# Altium PCB 基站转接板原理图.PcbDoc
Units mm, origin at the board's own origin, x right, y up, seen from the top; angles counter-clockwise.
Board outline 35 x 61 mm, 2 copper layers (Top Layer, Bottom Layer); 1 components, 9 nets, 4 pads, 0 vias.
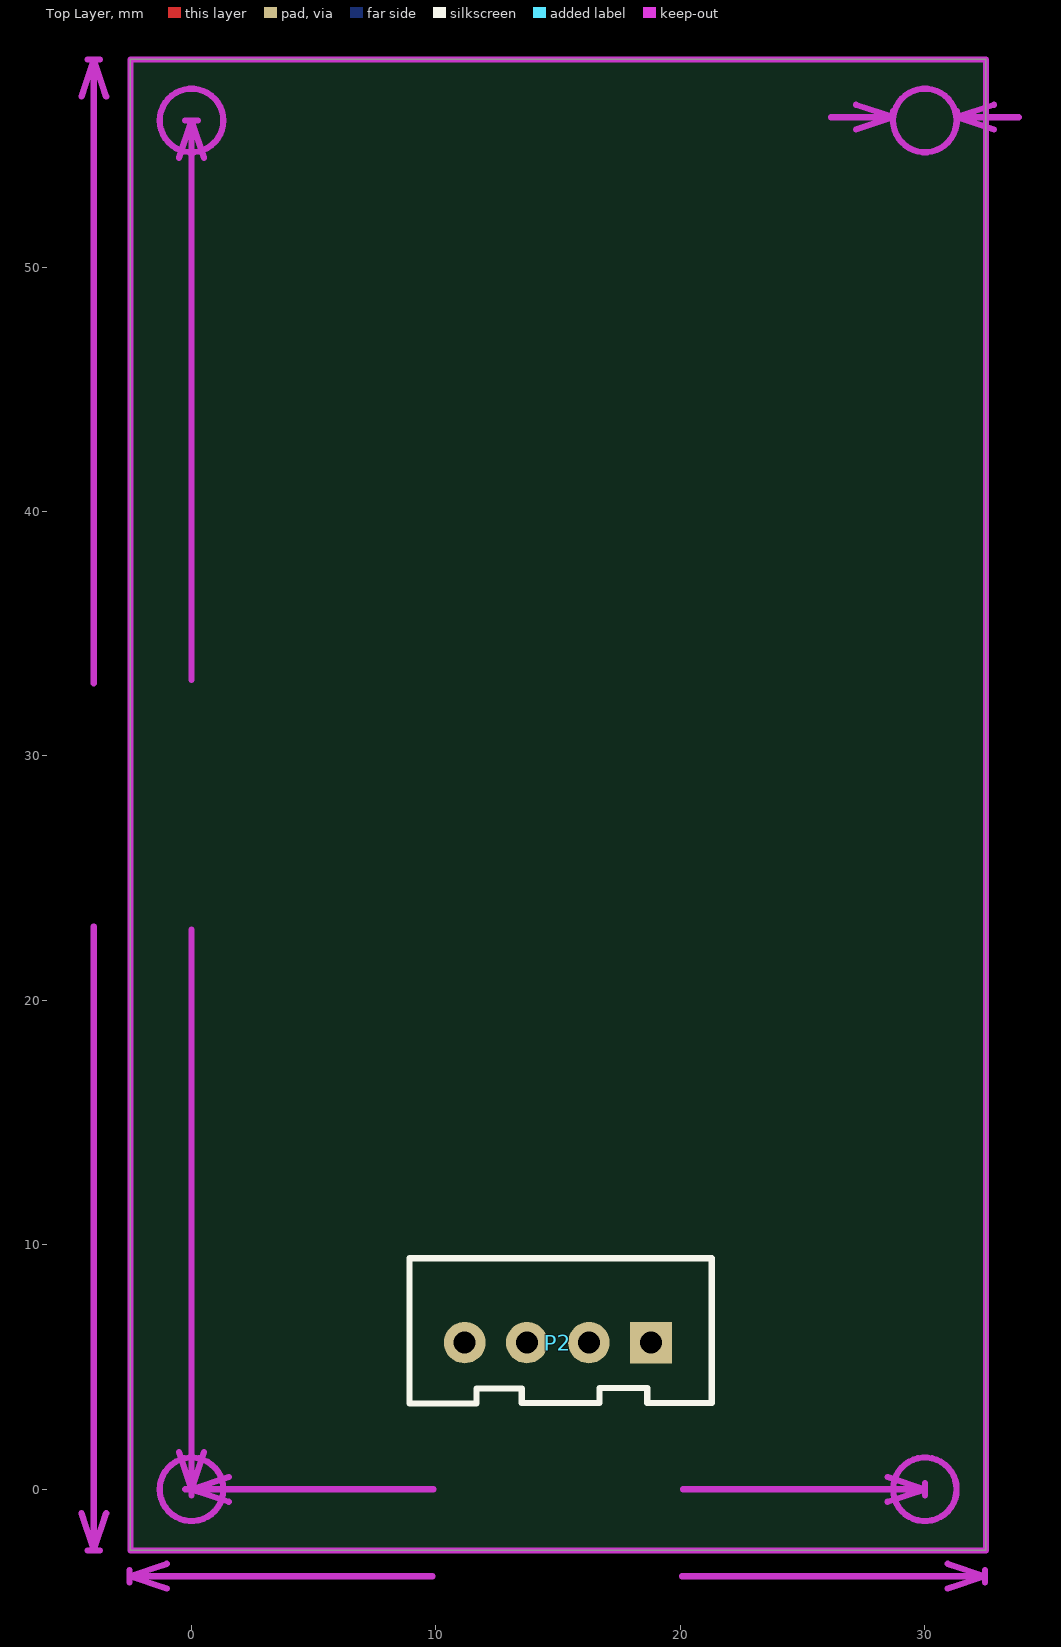
[diagram p0: Top Layer view]
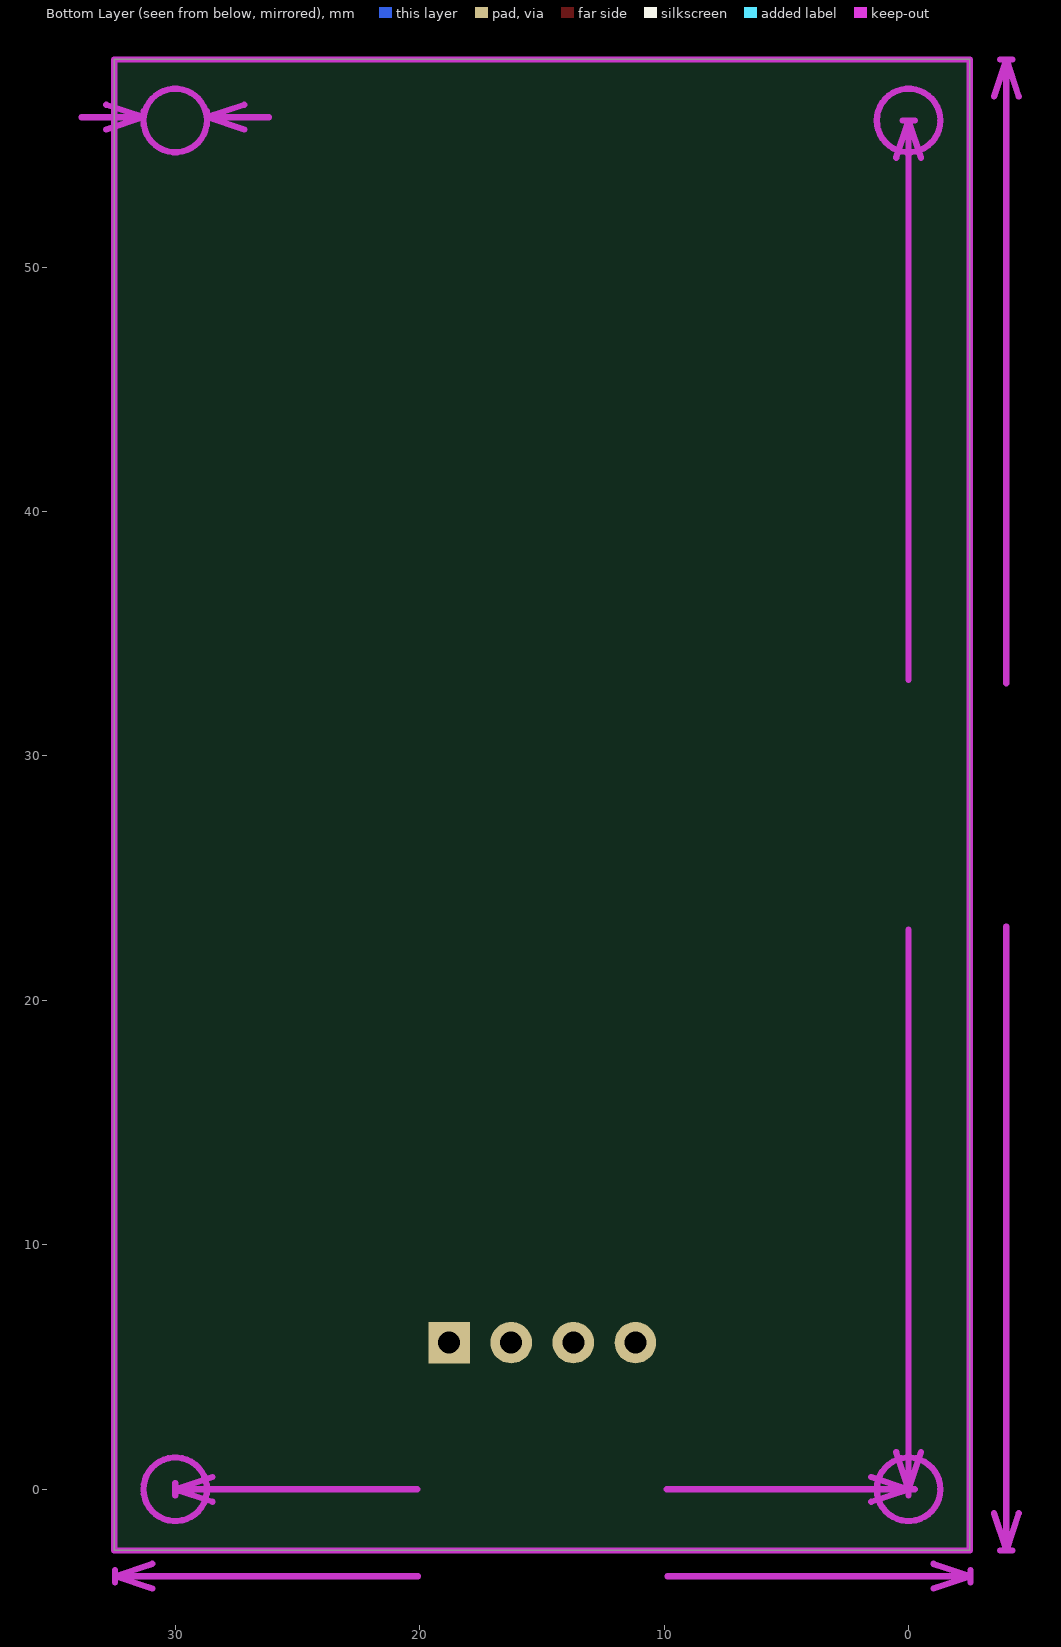
[diagram p1: Bottom Layer view, seen from below]

## Layer stack, top to bottom
Top Solder: solder mask 0.0102, Solder Resist, Dk 3.5
Top Layer: signal copper 0.0356
Dielectric 1: dielectric 0.32, FR-4, Dk 4.8
Bottom Layer: signal copper 0.0356
Bottom Solder: solder mask 0.0102, Solder Resist, Dk 3.5

## Board outline
-2.5,-2.5 -2.5,58.5 32.5,58.5 32.5,-2.5

## Design rules (kind name [scope] priority, off if disabled: settings)
Clearance Clearance_1 [InNet('+3.3V')] p1: gap=0.254 except(0.508: Arc-Poly Track-Poly SMDPad-Poly THPad-Poly Via-Poly Fill-Poly Poly-Poly)
Clearance [All] p2: gap=0.254 except(0.381: Arc-Poly Track-Poly SMDPad-Poly THPad-Poly Via-Poly Fill-Poly Poly-Poly)
PolygonConnect [All] p1: connectstyle=Direct reliefconductorwidth=0.254 reliefentries=2 polygonreliefangle="90 Angle" airgapwidth=0.254
RoutingVias [All] p1: holewidth=0.711 width=1.27 viastyle="Through Hole" minholewidth=0.711 minwidth=1.27 maxholewidth=0.711 maxwidth=1.27
SolderMaskExpansion [All] p1: expansion=0.102
Width Width_1 [All] p1: maxlimit=1.27 minlimit=0.254 preferedwidth=0.254 minimp=50.000000 maximp=50.000000 favimp=50.000000
Width [All] p2: maxlimit=0.254 minlimit=0.254 preferedwidth=0.254
30 further rules are at their usual default settings.

## Components (designator, comment, footprint, x,y, rotation, side; value= is the part's Value field where it differs from the comment)
P2 "XH2.54_1*4" XH2.54-LI-4P 14.986,6 r180 top

## Footprints (in the part's own frame and the unit in brackets; to place one, negate y for a bottom-side part, rotate by r counter-clockwise, add the part's x,y. Pads: shape width x height; smd on the part's side, far side on the other; paste and mask are expansions set on the pad)
XH2.54-LI-4P [mm] "接插件，4P"
  rect 1.7x1.7 hole 0.9: 1(-3.81,0)
  round 1.7 hole 0.9: 2(-1.27,0) 3(1.27,0) 4(3.81,0)
  silkscreen extent -6.3,-3.45 6.07,2.49, body extent -6.31,-3.3 6.31,2.4, height 7.03

## Nets (pads, with @x,y where several pads share a name; then routed paths per layer and width w, separated by ;. In a path a pad name is that pad's centre, name@x,y a point inside that pad or via, vN(x,y) a via of type N, cw(c..) or ccw(c..) an arc to the next point about the centre after c; other vN are vias at no path point)
GND: P2.1
GPIO7: 
MCU_RXD: P2.3
MCU_TXD: P2.4
NetLED1_1: 
NetLED_1: 
SWC: 
SWD: 
VCC: P2.2

## Keep-outs
Keep-Out Layer:
  circle w0.254: c30,56 r1.3
  circle w0.254: c0,56 r1.3
  circle w0.254: c30,0 r1.3
  circle w0.254: c0,0 r1.3
  lines w0.254: -4.508,-0.976 -4,-2.5 ; -4.508,56.976 -4,58.5 ; -4.254,-2.5 -3.746,-2.5 ; -4.254,58.5 -3.746,58.5 ; -4,23.023 -4,-2.5 ; -4,32.977 -4,58.5 ; -3.492,-0.976 -4,-2.5 ; -3.492,56.976 -4,58.5 ; -2.538,-3.81 -2.538,-3.302 ; -1.014,-4.064 -2.538,-3.556 ; -1.014,-3.048 -2.538,-3.556 ; -0.508,1.524 0,0 ; -0.508,54.476 0,56 ; -0.254,0 0.254,0 ; -0.254,56 0.254,56 ; 0,-0.254 0,0.254 ; 0,22.896 0,0 ; 0,33.104 0,56 ; 0.508,1.524 0,0 ; 0.508,54.476 0,56 ; 1.524,-0.508 0,0 ; 1.524,0.508 0,0 ; 9.858,-3.556 -2.538,-3.556 ; 9.896,0 0,0 ; 20.066,-3.556 32.462,-3.556 ; 20.104,0 30,0 ; 26.162,56.134 28.702,56.134 ; 27.178,55.626 28.702,56.134 ; 27.178,56.642 28.702,56.134 ; 28.476,-0.508 30,0 ; 28.476,0.508 30,0 ; 28.702,55.88 28.702,56.388 ; 30,-0.254 30,0.254 ; 30.938,-4.064 32.462,-3.556 ; 30.938,-3.048 32.462,-3.556 ; 31.302,55.88 31.302,56.388 ; 32.462,-3.81 32.462,-3.302 ; 32.826,55.626 31.302,56.134 ; 32.826,56.642 31.302,56.134 ; 33.842,56.134 31.302,56.134 ; -2.5,-2.5 -2.5,58.5 32.5,58.5 32.5,-2.5 -2.5,-2.5
  text "2.6 (mm)" at 24.517,52.477 h1.52
  text "61 (mm)" at -3.086,23.277 h1.52 r90
  text "56 (mm)" at 0.914,23.15 h1.52 r90
  text "30 (mm)" at 10.15,-0.914 h1.52
  text "35 (mm)" at 10.112,-4.47 h1.52

## Other copper
Top Layer:
  pour cut-out: 11.176,6 11.334,5.842 16.006,5.842 15.244,6.604 11.43,6.604